# Altium PCB Bhishma_SlaveLayout.PcbDoc (part 2 of 2)
Units mil, origin at the board's own origin, x right, y up, seen from the top; angles counter-clockwise.
Board outline 3750 x 3500 mil, 3 copper layers (Top Layer, Internal Plane 13, Bottom Layer); 96 components, 63 nets, 347 pads, 425 vias.
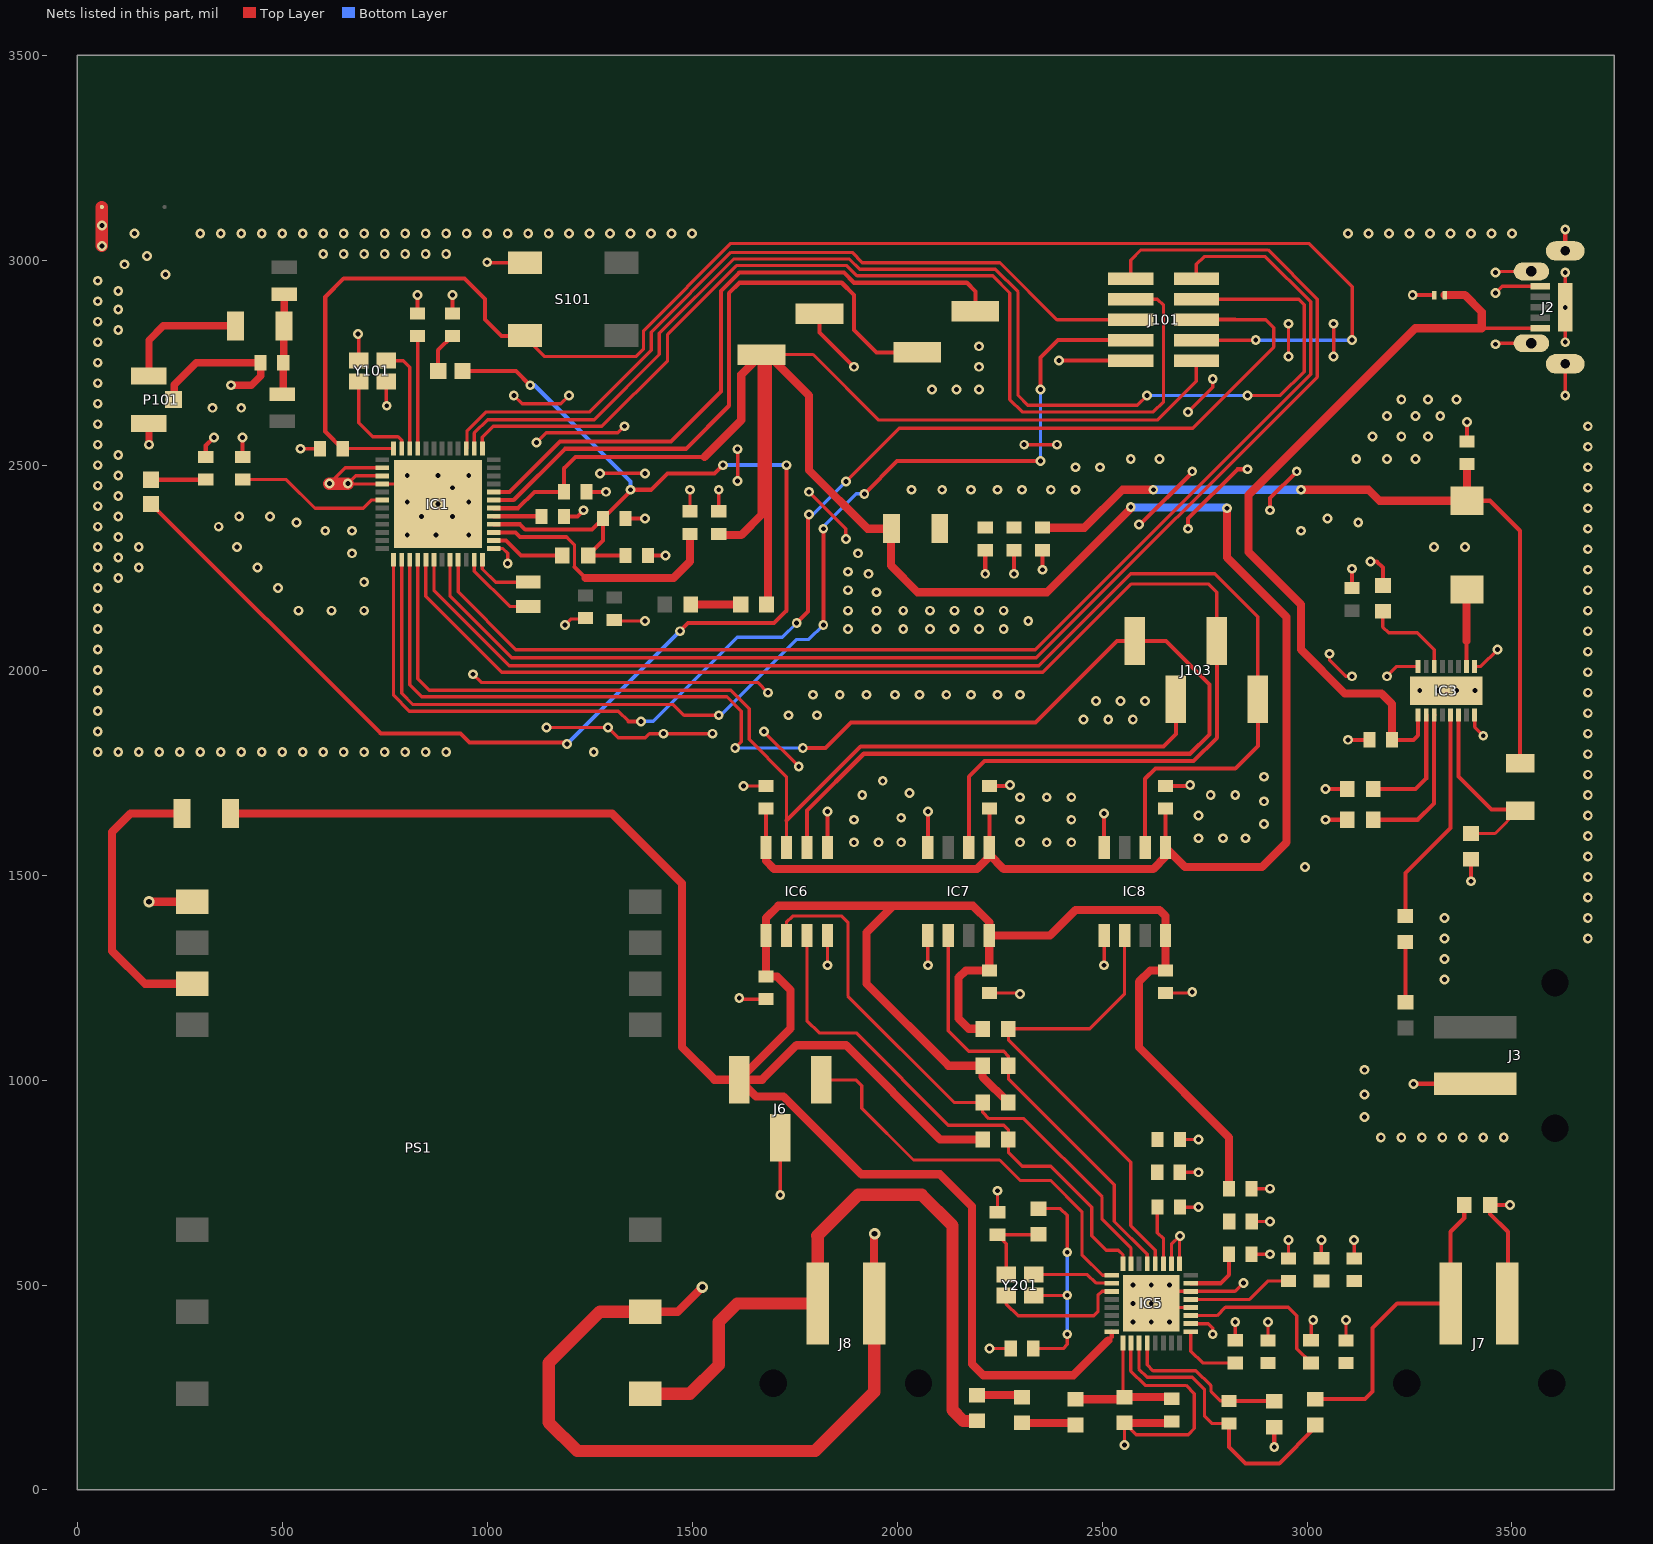
[diagram p3: the nets of this part, all layers, seen from the top]

## Via types
v1: diameter 24, hole 12, Top Layer to Bottom Layer, tented both sides, 422 vias
v2: diameter 28, hole 14, Top Layer to Bottom Layer, tented both sides, 3 vias

## Nets (pads, with @x,y where several pads share a name; then routed paths per layer and width w, separated by ;. In a path a pad name is that pad's centre, name@x,y a point inside that pad or via, vN(x,y) a via of type N, cw(c..) or ccw(c..) an arc to the next point about the centre after c; other vN are vias at no path point) (continued)
BGND: AT1.2 C31.1 C32.2 C33.1 C101.1 C102.2 C103.2 C106.2 C107.1 C108.2 C110.1 C111.1 C113.1 C115.2 C116.2 C118.2 C119.2 C123.1 C147.1 C148.1 C149.1 C217.2 C218.2 C220.2 D31.1 IC1.14 IC1.15 IC1.16 IC1.37 IC1.49 IC3.8 IC3.9 IC3.16 IC3.17 IC6.5 IC7.4 IC8.4 J2.5 J2.SH1 J2.SH2 J2.SH3 J2.SH4 J2.SH5 J3.1 J101.2 J105.2 P101.2 P101.3 R31.1 R32.1 R34.2 R36.1 S101.1 Y101.2 Y101.4 | length 7294.2
  Top Layer w8: v1(545,2540) C107.1@592.44,2540 ; v1(615,2455) 653.58,2493.58 IC1.14@744.17,2493.58 ; v1(685,2820) 686.54,2818.46 Y101.4@686.54,2755.59 ; IC1.15@744.17,2473.9 678.9,2473.9 v1(660,2455) 660.79,2454.21 IC1.16@744.17,2454.21 830.79,2454.21 v1(880,2405) ; Y101.2@753.46,2704.41 753.46,2646.54 v1(755,2645) ; v1(965,1990) 985,1970 1660,1970 v1(1685,1945) ; v1(1000,2995) 1001.42,2993.58 S101.1@1091.89,2993.58 ; IC1.37@1015.83,2296.73 1038.27,2296.73 1050,2285 v1(1050,2260) ; v1(1065,2670) 1085,2650 1180,2650 v1(1200,2670) ; v1(1120,2555) 1144,2579 1319,2579 v1(1335,2595) ; v1(1145,1860) v1(1295,1860) 1320,1835 1385.91,1835 1395.91,1845 v1(1430,1845) v1(1550,1845) ; v1(1190,2110) 1205,2125 1237.56,2125 C123.1@1240,2127.44 ; v1(1275,2480) v1(1385,2480) ; C113.1@1310,2122.44 1312.44,2120 v1(1385,2120) ; C111.1@1495,2387.56 v1(1495,2440) ; C110.1@1565,2387.56 v1(1565,2440) ; v1(1611,2461) v1(1611,2539) ; v1(1625,1717.56) C217.2@1680,1717.56 ; v1(1675,1850) v1(1760,1765) ; v1(1785,2435) 1875,2345 v1(1875,2320) ; v1(2310,2550) v1(2390,2550) ; v1(2710,2630) 2770,2690 v1(2770,2710) ; v1(2955,2765) v1(2955,2845) ; v1(3055,2040) 3055,2024.09 3094.09,1985 v1(3110,1985) ; v1(3065,2765) v1(3065,2845) ; v1(3195,1985) 3219.06,2009.06 IC3.16@3271.1,2009.06 ; IC3.8@3408.9,1890.94 3408.9,1861.1 v1(3430,1840) ; IC3.9@3408.9,2009.06 3424.06,2009.06 v1(3465,2050) ; v1(3460,2795) 3462.4,2797.4 J2.SH2@3547.32,2797.4 ; v1(3460,2920) 3476.18,2936.18 J2.5@3568.98,2936.18 ; v1(3460,2970) 3462.6,2972.6 J2.SH3@3547.32,2972.6 ; v1(3630,2670) J2.SH1@3630,2747.2 ; v1(3630,2800) v1(3630,2885) v1(3630,2970)
  Top Layer w10: C108.2@313.5,2520.12 313.5,2547.56 v1(333.5,2567.56) ; C106.2@403.5,2520.12 v1(403.5,2567.56) ; C102.2@830,2870.12 v1(830,2915) ; C103.2@915,2870.12 v1(915,2915) ; C118.2@1187.56,2375 1220,2375 v1(1235,2390) ; C115.2@1242.56,2435 v1(1290,2435) ; C119.2@1337.56,2370 v1(1385,2370) ; C116.2@1392.56,2280 v1(1435,2280) ; J105.2@1810.87,2870 1810.87,2824.13 v1(1895,2740) ; IC6.5@1830,1567.28 v1(1830,1655) ; IC7.4@2075,1567.28 v1(2075,1655) ; v1(2215,2235) C147.1@2215,2292.44 ; C218.2@2225,1717.56 2272.56,1717.56 v1(2275,1720) ; v1(2285,2235) C148.1@2285,2292.44 ; v1(2355,2245) C149.1@2355,2292.44 ; v1(2395,2755) J101.2@2570,2755 ; IC8.4@2505,1567.28 v1(2505,1650) ; v1(2590,2355) 2592.33,2355 2720,2482.67 v1(2720,2485) ; C220.2@2655,1717.56 2712.56,1717.56 v1(2715,1720) ; v1(2710,2345) 2710,2370 2830,2490 v1(2855,2490) ; v1(2910,2390) 2910,2420 v1(2975,2485) ; v1(3045,1635) R32.1@3098.5,1635 ; v1(3045,1710) R31.1@3098.5,1710 ; v1(3100,1830) C31.1@3152.44,1830 ; C32.2@3110,2200 v1(3110,2247.44) ; v1(3155,2265) 3170,2265 3185,2250 R34.2@3185,2206.5 ; v1(3257.8,2915) D31.1@3310,2915 ; v1(3260,990) 3261.1,991.1 J3.1@3410.12,991.1 ; C33.1@3390,2557.56 v1(3390,2605) ; v1(3400,1485) R36.1@3400,1538.5 ; J2.SH4@3630,3022.8 v1(3630,3075)
  Top Layer w18: v1(175,2550) P101.2@174.96,2601.93 ; P101.3@236.27,2661.27 236.27,2696.27 290,2750 C101.1@447.44,2750 447.44,2717.44 425,2695 v1(375,2695)
  Top Layer w20: v1(175,2550) v1(175,2550) ; P101.3@235,2660 P101.3@236.27,2661.27
  Top Layer w30: v1(60,3035) v1(60,3085) AT1.2@60,3130 ; v1(615,2455) v1(660,2455)
  other v1: 3180,860 3230,860 3280,860 3330,860 3380,860 3430,860 3480,860 3140,910 3140,965 3140,1025 3335,1245 3335,1295 3335,1345 3685,1345 3335,1395 3685,1395 3685,1445 3685,1495 2995,1520 3685,1545 1895,1580 1955,1580 2010,1580 2300,1580 2365,1580 2425,1580 2735,1590 2795,1590 2850,1590 3685,1595 2895,1625 1895,1635 2300,1635 2425,1635 2010,1640 2735,1645 3685,1645 2895,1680 2300,1690 2365,1690 2425,1690 1915,1695 2765,1695 2825,1695 3685,1695 2030,1700 1965,1730 2895,1740 3685,1745 3685,1795 50,1800 100,1800 150,1800 200,1800 250,1800 300,1800 350,1800 400,1800 450,1800 500,1800 550,1800 600,1800 650,1800 700,1800 750,1800 800,1800 850,1800 900,1800 1260,1800 3685,1845 50,1850 2455,1880 2515,1880 2575,1880 1735,1890 1805,1890 3685,1895 50,1900 2485,1925 2545,1925 2605,1925 1795,1940 1860,1940 1925,1940 1995,1940 2055,1940 2120,1940 2180,1940 2245,1940 2300,1940 3685,1945 50,1950 3275,1950 3320,1950 3365,1950 3410,1950 3685,1995 50,2000 3685,2045 50,2050 3685,2095 50,2100 1880,2100 1950,2100 2015,2100 2080,2100 2140,2100 2200,2100 2260,2100 2320,2120 540,2145 620,2145 700,2145 1880,2145 1950,2145 2015,2145 2080,2145 2140,2145 2200,2145 2260,2145 3685,2145 50,2150 1950,2190 1880,2195 3685,2195 50,2200 490,2200 700,2215 100,2225 1930,2235 1880,2240 3685,2245 50,2250 150,2250 440,2250 100,2275 670,2285 1905,2285 3685,2295 50,2300 150,2300 390,2300 3310,2300 3385,2300 100,2325 805,2330 875,2330 955,2330 605,2340 670,2340 2985,2340 3685,2345 50,2350 345,2350 535,2360 3125,2360 3050,2370 100,2375 395,2375 470,2375 840,2375 915,2375 3685,2395 50,2400 805,2410 955,2410 100,2425 2035,2440 2110,2440 2180,2440 2245,2440 2305,2440 2375,2440 2435,2440 915,2445 3685,2445 50,2450 100,2475 805,2475 880,2475 955,2475 2435,2495 2495,2495 3685,2495 50,2500 2570,2515 2640,2515 3120,2515 3195,2515 3265,2515 100,2525 3685,2545 50,2550 3160,2570 3230,2570 3295,2570 3685,2595 50,2600 3195,2620 3265,2620 3325,2620 330,2640 400,2640 50,2650 3230,2660 3295,2660 3365,2660 2085,2685 2145,2685 2200,2685 50,2700 2200,2740 50,2750 2200,2790 50,2800 100,2830 50,2850 100,2880 50,2900 100,2925 50,2950 215,2965 115,2990 170,3010 600,3015 650,3015 700,3015 750,3015 800,3015 850,3015 900,3015 140,3065 300,3065 350,3065 400,3065 450,3065 500,3065 550,3065 600,3065 650,3065 700,3065 750,3065 800,3065 850,3065 900,3065 950,3065 1000,3065 1050,3065 1100,3065 1150,3065 1200,3065 1250,3065 1300,3065 1350,3065 1400,3065 1450,3065 1500,3065 3100,3065 3150,3065 3200,3065 3250,3065 3300,3065 3350,3065 3400,3065 3450,3065 3500,3065
CLK_OUT: IC5.1 J6.3 | length 999.8
  Top Layer w8: J6.3@1815,1000.87 1815.87,1000 1900,1000 1914,986 1914,931 2040,805 2250,805 2300,755 2375,755 2451,679 2451,574 2501.1,523.9 IC5.1@2523.54,523.9
CMU_CLK0: IC1.43 J104.1 | length 1533.9
  Top Layer w10: IC1.43@1015.83,2414.84 1064.84,2414.84 1190,2540 1485,2540 1590,2645 1590,2919.54 1615.46,2945 1865,2945 1895,2915 1895,2830 1950,2775 J104.1@2049.13,2775
CMU_CLK1: IC1.44 J104.2 | length 1608.5
  Top Layer w10: IC1.44@1015.83,2434.53 1054.53,2434.53 1178,2558 1448,2558 1570,2680 1570,2925 1615,2970 1870,2970 1895,2945 2170,2945 2190.87,2924.13 J104.2@2190.87,2875
CT: J7.1 R207.2 R209.2 | length 773.1
  Top Layer w10: R207.2@3020,221.5 3141.5,221.5 3160,240 3160,395 3220,455 3279.76,455 3279.88,454.88 J7.1@3351.1,454.88 3350,455.98 3350,630 3383.5,663.5 R209.2@3383.5,695
DEBUG.RESET: C107.2 IC1.12 J101.3 S101.3 | length 3838.1
  Top Layer w8: C107.2@647.56,2540 648.39,2540.83 IC1.12@771.73,2540.83 ; S101.3@1090.47,2815 1140.47,2765 1362.56,2765 1381.45,2783.89 1381.45,2828.37 1594.08,3041 3004,3041 3110,2935 v1(3110,2805) ; J101.3@2730,2805 v1(2875,2805)
  Top Layer w10: C107.2@647.56,2540 605,2582.56 605,2910 650,2955 945,2955 995,2905 995,2855 1035,2815 S101.3@1090.47,2815
  Bottom Layer w8: v1(2875,2805) v1(3110,2805)
DEBUG.TCK_SWCLK: IC1.1 J101.8 | length 2531.9
  Top Layer w8: IC1.1@988.27,2540.83 988.27,2568.27 1015,2595 1280,2595 1440,2755 1440,2819.04 1607.96,2987 1877.04,2987 1902.04,2962 2233,2962 2275,2920 2275,2660 2305,2630 2625,2630 2650,2655 2650,2890 2635,2905 J101.8@2570,2905
DEBUG.TDO_SWO: IC1.3 J101.6 | length 1938
  Top Layer w8: IC1.3@948.9,2540.83 950.68,2540.83 950.68,2583.3 997.37,2630 1250.19,2630 1400,2779.81 1400,2824.3 1594.7,3019 1890.3,3019 1915.3,2994 2251,2994 2390,2855 J101.6@2570,2855
DEBUG.TMS_SWDIO: IC1.2 J101.7 | length 3030.2
  Top Layer w8: IC1.2@968.58,2540.83 968.58,2578.58 1001,2611 1261,2611 1420,2770 1420,2821.67 1601.33,3003 1883.67,3003 1908.67,2978 2239.63,2978 2295,2922.63 2295,2670 2319,2646 2586,2646 v1(2610,2670) ; J101.7@2730,2905 2979.75,2905 2993,2891.75 2993,2728.25 2934.87,2670.13 2855.13,2670.13 v1(2855,2670)
  Bottom Layer w8: v1(2610,2670) v1(2855,2670)
DECOUPLE: C118.1 IC1.41 | length 116.6
  Top Layer w10: IC1.41@1015.83,2375.47 C118.1@1132.44,2375.47
DVDD: C116.1 C119.1 IC1.40 L103.2 L104.1 L105.1 | length 3806.2
  Top Layer w10: L105.1@180,2405.47 740.47,1845 935,1845 957,1823 1192,1823 v1(1195,1820) ; L104.1@939.53,2730 1070,2730 v1(1105,2695) ; IC1.40@1015.83,2355.79 1080,2355.79 1092.79,2343 1255.44,2343 C119.1@1282.44,2370 ; C116.1@1337.44,2280 L103.2@1246.5,2280 1282.44,2315.94 C119.1@1282.44,2370 ; v1(1470,2095) 1490,2115 1700,2115 1730,2145 v1(1730,2500) ; v1(1575,2500) 1555,2480 1440,2480 1400,2440 v1(1350,2440) 1350,2437.56 C119.1@1282.44,2370
  Bottom Layer w10: v1(1105,2695) 1115,2695 1350,2460 v1(1350,2440) ; v1(1195,1820) v1(1470,2095) ; v1(1575,2500) v1(1730,2500)
FRC_DFRAME: IC1.33 J101.9 | length 3039.1
  Top Layer w8: IC1.33@929.21,2269.17 929.21,2190.79 1070,2050 2337.37,2050 3009,2721.63 3009,2898.37 2898.37,3009 2749,3009 2730,2990 J101.9@2730,2955
FRC_DOUT: IC1.32 J101.10 | length 3300.3
  Top Layer w8: IC1.32@909.53,2269.17 909.53,2180.47 1060,2030 2340,2030 3025,2715 3025,2905 2905,3025 2595,3025 2570,3000 J101.10@2570,2955
HFXTAL_N: IC1.10 Y101.3 | length 262.6
  Top Layer w8: Y101.3@753.46,2755.59 754.06,2755 795,2755 811.1,2738.9 IC1.10@811.1,2540.83
HFXTAL_P: IC1.11 Y101.1 | length 243.4
  Top Layer w8: Y101.1@686.54,2704.41 686.54,2603.46 720.44,2569.56 782.61,2569.56 791.42,2560.75 IC1.11@791.42,2540.83
IOVDD: C110.2 C111.2 C115.1 C217.1 C218.1 C220.1 IC1.39 IC1.42 IC6.8 IC7.1 IC8.1 J101.1 J105.1 L106.2 R104.2 | length 8102.5
  Top Layer w8: IC1.42@1015.83,2395.16 IC1.42@1015.98,2395 ; 1192.88,2325 1213.22,2304.66 1213.22,2251.78 ; C111.2@1490,2327.44 C111.2@1495,2332.44 ; J105.1@1685,2770 1795,2770 1955,2610 2635,2610 2730,2705 J101.1@2730,2755 ; IC7.1@2225,1545 IC7.1@2225,1550
  Top Layer w10: IC1.39@1015.83,2336.1 1068.9,2336.1 1080,2325 1192.88,2325 ; IC1.42@1015.98,2395 1075,2395 1115,2435 C115.1@1187.44,2435 1187.44,2492.44 1215,2520 1530,2520 ; 1213.22,2251.78 1240,2225 ; C110.2@1565,2332.44 C110.2@1567.44,2330 ; J105.1@1669.13,2770 J105.1@1685,2754.13 ; IC6.8@1680,1567.28 C217.1@1680,1662.44 ; R104.2@1985,2344.06 R104.2@1985.94,2345 ; IC7.1@2225,1567.28 C218.1@2225,1662.44 ; IC8.1@2655,1567.28 C220.1@2655,1662.44
  Top Layer w20: 1240,2225 1455,2225 1495,2265 C111.2@1495,2332.44 ; 1530,2520 1620,2610 1620,2720.87 J105.1@1669.13,2770 1669.13,2379.13 1620,2330 C110.2@1567.44,2330 ; IC6.8@1680,1567.28 1680,1535 1700,1515 2195,1515 IC7.1@2225,1545 ; L106.2@1681.5,2160 1685,2163.5 J105.1@1685,2754.13 ; J105.1@1685,2770 1785,2670 1785,2487.67 1927.67,2345 R104.2@1985.94,2345 ; R104.2@1985,2344.06 1985,2255 2050,2190 2365.6,2190 2570,2394.4 v1(2570,2397.67) ; IC7.1@2225,1567.28 2225,1550 2260,1515 2625,1515 2655,1545 IC8.1@2655,1567.28 2702.28,1520 2890,1520 2950,1580 2950,2130 2805,2275 v1(2805,2395)
  Bottom Layer w10: v1(2570,2397.67) 2570,2400 v1@2573,2397 ; v1@2803,2397 v1(2805,2395)
  Bottom Layer w20: v1@2573,2397 v1@2803,2397
IP_1: C222.2 IC5.11 R207.1 | length 702.9
  Top Layer w8: IC5.11@2590.47,358.54 2590,358.07 2590,295 2610,275 2720,275 2750,245 2750,180 2767.56,162.44 C222.2@2810,162.44
  Top Layer w10: C222.2@2810,162.44 2810,105 2850,65 2932.33,65 3020,152.67 R207.1@3020,158.5
IP_2: C222.1 IC5.12 R208.1 | length 408.5
  Top Layer w8: IC5.12@2610.16,358.54 2610,358.39 2610,305 2624,291 2729,291 2765,255 2765,253.63 2766,252.63 2766,240 2788.44,217.56 C222.1@2810,217.56
  Top Layer w10: C222.1@2810,217.56 2918.94,217.56 R208.1@2920,216.5
L: J8.1 PS1.1 R210.1 | length 1662.2
  Top Layer w20: 1805,620 1806.1,618.9 ; J8.1@1805.98,455 J8.1@1806.1,454.88
  Top Layer w30: PS1.1@1385.67,235 1495,235 1565,305 1565,410 1610,455 J8.1@1805.98,455 ; 1805,620 1905,720 2060,720 2135,645 2135,195 2161.5,168.5 R210.1@2195,168.5 ; J8.1@1806.1,454.88 1806.1,618.9
N: C201.1 C202.1 C203.1 C204.1 C205.1 C206.1 C207.1 C208.1 C209.1 C210.1 C211.1 C212.1 C213.1 C214.1 C215.1 C216.2 C219.2 C221.2 C223.1 IC5.10 IC5.18 IC5.20 IC5.22 IC5.25 IC5.26 IC5.33 IC6.4 IC7.5 IC8.5 J6.2 J7.2 J8.2 PS1.3 PS1.14 R208.2 R209.1 R213.1 | length 4845.9
  Top Layer w8: v1(1615,1200) 1617.56,1197.44 C216.2@1680,1197.44 ; v1(1715,720) J6.2@1715,859.13 ; v1(1830,1280) IC6.4@1830,1352.72 ; v1(2075,1280) IC7.5@2075,1352.72 ; v1(2225,345) C201.1@2277.44,345 ; C219.2@2225,1212.44 2297.56,1212.44 v1(2300,1210) ; C202.1@2245,677.56 v1(2245,730) ; v1(2505,1280) IC8.5@2505,1352.72 ; v1(2555,110) R213.1@2555,163.5 2583.5,135 2710,135 2725,150 2725,235 2705,255 2605,255 2570,290 2570,357.76 IC5.10@2570.79,358.54 ; C221.2@2655,1212.44 2717.44,1212.44 v1(2720,1215) ; IC5.26@2669.21,551.46 2669.21,599.21 2688.9,618.9 IC5.25@2688.9,551.46 ; C210.1@2690,690 v1(2735,690) ; C211.1@2690,775 v1(2735,775) ; C212.1@2690,855 v1(2735,855) ; IC5.18@2716.46,405.79 2759.21,405.79 2770,395 v1(2770,380) ; IC5.20@2716.46,445.16 2629.84,445.16 v1(2620,455) 2649.53,484.53 IC5.22@2716.46,484.53 2824.53,484.53 v1(2845,505) ; C204.1@2825,365 v1(2825,410) ; C213.1@2865,575 v1(2909.88,575) ; C214.1@2865,655 v1(2909.88,655) ; C215.1@2865,735 v1(2909.88,735) ; C203.1@2905,365 v1(2905,410) ; C209.1@2955,565 v1(2955,610) ; C206.1@3010,365 3010,410 v1(3015,415) ; C208.1@3035,565 v1(3035,610) ; C205.1@3095,365 v1(3095,415) ; C207.1@3115,565 v1(3115,610)
  Top Layer w10: v1(2920,105) R208.2@2920,153.5 ; J7.2@3488.9,454.88 3490,455.98 3490,630 3446.5,673.5 R209.1@3446.5,695 v1(3495,695)
  Top Layer w20: v2(175,1435) PS1.14@280.55,1435 ; PS1.3@1385.67,435 1465,435 v2(1525,495) ; J8.2@1943.9,454.88 1943.9,623.9 v2(1945,625) ; R213.1@2555,163.5 2666.06,163.5 C223.1@2670,167.44
  Top Layer w30: PS1.3@1385.67,435 1275,435 1150,310 1150,165 1220,95 1800,95 1943.9,238.9 J8.2@1943.9,454.88
  other v1: 2575,410 2620,410 2665,410 2575,455 2575,500 2620,500 2665,500 2690,620
NetC31_2: C31.2 D31.2 IC3.1 J2.1 | length 1941.4
  Top Layer w8: 3426.18,2833.82 J2.1@3568.98,2833.82
  Top Layer w10: C31.2@3207.56,1830 3260,1830 3271.1,1841.1 IC3.1@3271.1,1890.94 ; D31.2@3335.35,2914.76 D31.2@3335.59,2915
  Top Layer w20: C31.2@3207.56,1830 3207.56,1917.44 3182,1943 3092,1943 2985,2050 2985,2160 2857,2288 2857,2427 3263.82,2833.82 3426.18,2833.82 3426.18,2873.82 3385,2915 D31.2@3335.59,2915
NetC33_2: C33.2 C147.2 C148.2 C149.2 L2.2 R35.2 R104.1 | length 1967.6
  Top Layer w8: C147.2@2212.44,2345 C147.2@2215,2347.56
  Top Layer w10: L2.2@3390,2413.27 3446.73,2413.27 3520,2340 R35.2@3520,1772.87
  Top Layer w20: C149.2@2355,2347.56 2457.44,2347.56 2549.88,2440 v1(2625,2440) ; v1(2985,2440) 3150,2440 3176.73,2413.27 L2.2@3390,2413.27 C33.2@3390,2502.44
  Bottom Layer w8: v1(2985,2440) 3048,2440
  Bottom Layer w20: v1(2625,2440) v1(2985,2440)
NetC101_2: C101.2 L101.1 L102.2 R102.1 | length 246.5
  Top Layer w10: L102.2@500,2672.8 L102.2@502.56,2675.35
  Top Layer w18: L102.2@502.56,2675.35 C101.2@502.56,2750 ; C101.2@504.06,2751.5 R102.1@504.06,2840 ; R102.1@505,2840.94 L101.1@505,2917.2
  Top Layer w20: C101.2@502.56,2750 C101.2@504.06,2751.5 ; R102.1@504.06,2840 R102.1@505,2840.94
NetC201_2: C201.2 R201.2 Y201.2 | length 560.2
  Top Layer w8: C201.2@2332.56,345 2405,345 2415,355 v1(2415,380) ; Y201.2@2333.46,474.41 2414.41,474.41 v1(2415,475) ; R201.2@2345,686.5 2398.5,686.5 2415,670 v1(2415,580)
  Bottom Layer w8: v1(2415,380) v1(2415,475) v1(2415,580)
NetC202_2: C202.2 R201.1 Y201.4 | length 207.5
  Top Layer w8: Y201.4@2267.44,526.5 Y201.4@2266.54,525.59 2266.54,600.91 C202.2@2245,622.44 2343.94,622.44 R201.1@2345,623.5
NetIC3_2: IC3.2 R31.2 | length 295.1
  Top Layer w10: R31.2@3161.5,1710 3265,1710 3290.79,1735.79 IC3.2@3290.79,1890.94
NetIC3_3: IC3.3 R32.2 | length 381.2
  Top Layer w10: R32.2@3161.5,1635 3270,1635 3310,1675 3310,1890.47 IC3.3@3310.47,1890.94
NetIC3_5: IC3.5 LED2.1 | length 536.4
  Top Layer w10: LED2.1@3240,1400 3240,1505 3349.84,1614.84 IC3.5@3349.84,1890.94
NetIC3_14: IC3.14 R34.1 | length 227.4
  Top Layer w8: R34.1@3185,2143.5 3185,2105 3199,2091 3269,2091 3310.47,2049.53 IC3.14@3310.47,2009.06
NetL106_1: L106.1 R101.2 | length 122
  Top Layer w20: R101.2@1496.5,2160 L106.1@1618.5,2160
NetLED2_2: LED2.2 R33.2 | length 147
  Top Layer w10: R33.2@3240,1190 LED2.2@3240,1337.01
NetP101_1: P101.1 R102.2 | length 312.4
  Top Layer w18: P101.1@174.96,2718.07 174.96,2804.96 210,2840 R102.2@385.94,2840
  Top Layer w20: P101.1@174.96,2718.07 P101.1@174.96,2718.07
NetPS1_16: PS1.16 R202.1 | length 708.3
  Top Layer w20: R202.1@255.94,1650 130,1650 85,1605 85,1315 165,1235 PS1.16@280.55,1235
NetR210_2: R210.2 R211.1 | length 112.1
  Top Layer w20: R210.2@2195,231.5 2300,231.5 R211.1@2305,226.5
NetR211_2: R211.2 R212.1 | length 132.1
  Top Layer w20: R211.2@2305,163.5 2430,163.5 R212.1@2435,158.5
PA2: IC1.27 IC6.6 J103.1 | length 3817
  Top Layer w8: IC1.27@811.1,2269.17 811.1,1963.9 840,1935 1585,1935 1620,1900 1620,1825 v1(1605,1810)
  Top Layer w10: v1(1770,1810) 1825,1810 1887.71,1872.71 2337.71,1872.71 2536.26,2071.26 J103.1@2580,2071.26 2655.74,2071.26 2762,1965 2762,1843 2715,1796 1918.67,1796 1780,1657.33 IC6.6@1780,1567.28
  Bottom Layer w8: v1(1605,1810) v1(1770,1810)
PA3: IC1.28 IC6.7 J103.2 | length 2627.1
  Top Layer w8: IC1.28@830.79,2269.17 830.79,1979.21 859,1951 1594,1951 1639,1906 1639,1831 1730,1740 1730,1632.78 IC6.7@1730,1567.28
  Top Layer w10: 1730,1632.78 1911.22,1814 2650,1814 2680,1844 J103.2@2680,1928.74
PA4: IC1.29 IC7.2 J103.3 | length 3365.3
  Top Layer w8: IC1.29@850.47,2269.17 850.13,2268.83 850.13,2179.87 1035,1995 2355.46,1995 2570.46,2210 2760,2210 2780,2190 J103.3@2780,2071.26
  Top Layer w10: IC7.2@2175,1567.28 2175,1740 2213,1778 2723,1778 2780,1835 J103.3@2780,2071.26
PA5: IC1.30 IC8.2 J103.4 | length 3087.6
  Top Layer w8: IC1.30@870.16,2269.17 870,2269.02 870,2195 1054,2011 2346,2011 2570,2235 2775,2235 2880,2130 J103.4@2880,1928.74
  Top Layer w10: IC8.2@2605,1567.28 2605,1735 2630,1760 2825,1760 2880,1815 J103.4@2880,1928.74
PAVDD_MCU: C106.1 C108.1 IC1.18 L105.2 | length 511.6
  Top Layer w8: C108.1@313.03,2464.53 C108.1@313.5,2465 ; C106.1@403.5,2465 510,2465 580,2395 697.38,2395 717.22,2414.84 IC1.18@744.17,2414.84
  Top Layer w10: L105.2@180,2464.53 C108.1@313.03,2464.53
PB14: IC1.35 Y102.2 | length 194.8
  Top Layer w8: IC1.35@968.58,2269.17 968.58,2241.42 1054.53,2155.47 Y102.2@1100,2155.47
PB15: IC1.36 Y102.1 | length 147.5
  Top Layer w8: IC1.36@988.27,2269.17 988.27,2246.73 1020.47,2214.53 Y102.1@1100,2214.53
RFVDD_MCU: C102.1 C103.1 IC1.9 L104.2 | length 373.8
  Top Layer w8: C102.1@830,2815 830.79,2814.21 IC1.9@830.79,2540.83
  Top Layer w10: L104.2@880.47,2730 880.47,2780.47 C103.1@915,2815
RX_IC: IC5.31 IC6.2 R204.1 | length 1404.3
  Top Layer w8: IC6.2@1730,1352.72 1730,1385 1745,1400 1865,1400 1880,1385 1880,1205 2140,945 R204.1@2208.5,945 2208.5,921.5 2224,906 2309,906 2500,715 2500,660 2570.79,589.21 IC5.31@2570.79,551.46
SCS_IC: IC5.29 IC7.6 R205.1 | length 1052
  Top Layer w8: IC7.6@2125,1352.72 2125,1120 2175,1070 2260,1070 2271.5,1058.5 R205.1@2271.5,1035 2271.5,1003.5 2530,745 2530,655 2610.16,574.84 IC5.29@2610.16,551.46
SW: IC3.10 L2.1 | length 186.4
  Top Layer w8: L2.1@3389.21,2195.94 L2.1@3390,2196.73
  Top Layer w10: IC3.10@3389.21,2009.06 3389.21,2069.21
  Top Layer w20: 3389.21,2070.79 L2.1@3389.21,2195.94
SYN_IC: IC5.28 IC8.6 R206.1 | length 1183.4
  Top Layer w8: IC8.6@2555,1352.72 2555,1210 2470,1125 R206.1@2271.5,1125 2271.5,1098.5 2570,800 2570,645 2629.84,585.16 IC5.28@2629.84,551.46
TX_IC: IC5.32 IC6.3 R203.1 | length 1311
  Top Layer w8: IC6.3@1780,1352.72 1780,1145 1810,1115 1900,1115 2125,890 2260,890 2271.5,878.5 R203.1@2271.5,855 2271.5,823.5 2305,790 2375,790 2475,690 2475,620 2510,585 2540,585 2551.1,573.9 IC5.32@2551.1,551.46
VCC: C213.2 C214.2 C215.2 C216.1 C219.1 C221.1 IC5.8 IC5.23 IC6.1 IC7.8 IC8.8 J6.1 R202.2 R203.2 R204.2 R205.2 R206.2 | length 7499.6
  Top Layer w10: 2515,365 2523.54,373.54 IC5.8@2523.54,386.1 ; IC5.23@2716.46,504.21 2789.21,504.21 2810,525 C213.2@2810,574.88
  Top Layer w20: R202.2@374.06,1650 1305,1650 1475,1480 1475,1080 1554.13,1000.87 J6.1@1615,1000.87 ; R203.2@2208.5,855 2105,855 1875,1085 1755,1085 1670.87,1000.87 J6.1@1615,1000.87 ; R206.2@2208.5,1125 2175,1125 2150,1150 2150,1250 2167.56,1267.56 C219.1@2225,1267.56 IC7.8@2225,1352.72 ; R204.2@2271.5,945 2208.5,1007.99 R205.2@2208.5,1035 2125,1035 1925,1235 1925,1360 1990,1425 ; 2515,365 2430,280 2210,280 2183,307 2183,692 2105,770 1912.86,770 1722.86,960 1655.87,960 J6.1@1615,1000.87 ; C213.2@2809.88,575 C213.2@2810,574.88 ; C215.2@2809.88,735 2809.88,860.12 2590,1080 2590,1240 2617.56,1267.56 C221.1@2655,1267.56 IC8.8@2655,1352.72 2655,1400 2640,1415 2435,1415 2372.72,1352.72 IC7.8@2225,1352.72 ; J6.1@1615,1000.87 1740,1125.87 1740,1220 1707.44,1252.56 C216.1@1680,1252.56 IC6.1@1680,1352.72 1680,1395 1710,1425 1990,1425 ; 1990,1425 2185,1425 2225,1385 IC7.8@2225,1352.72
VCOM.RX_MISO: IC1.26 J101.4 | length 2793.8
  Top Layer w8: IC1.26@791.42,2269.17 791.42,1943.58 819,1916 1454,1916 1480,1890 v1(1565,1890)
  Top Layer w10: v1(1820,2110) v1(1820,2345) ; v1(1920,2430) 2000,2510 v1(2350,2510) ; v1(2350,2685) 2350,2762.33 2392.67,2805 J101.4@2570,2805
  Bottom Layer w8: v1(1565,1890) 1570,1890 1755,2075 1785,2075 v1(1820,2110) ; v1(1820,2345) 1820,2350 1900,2430 v1(1920,2430) ; v1(2350,2510) v1(2350,2685)
VCOM.TX_MOSI: IC1.25 J101.5 | length 3269.4
  Top Layer w8: IC1.25@771.73,2269.17 771.73,1938.27 810,1900 1320,1900 1345,1875 ; v1(1755,2115) v1@1760,2115 ; v1(1875,2460) 2005,2590 2720.91,2590 2919,2788.09 2919,2835 2899,2855 2825,2855
  Top Layer w10: 1345,1875 v1(1375,1875) ; v1(1755,2115) 1783,2143 1783,2378 v1(1785,2380) ; J101.5@2730,2855 2825,2855
  Bottom Layer w8: v1(1375,1875) 1405,1875 1610,2080 1720,2080 v1(1755,2115) ; v1(1785,2380) 1795,2380 v1(1875,2460)
VDDA: C207.2 C208.2 C209.2 IC5.21 | length 257.2
  Top Layer w8: IC5.21@2716.46,464.84 2859.84,464.84 2904.88,509.88 C209.2@2955,509.88
VDDD: C210.2 C211.2 C212.2 IC5.27 | length 145
  Top Layer w8: C210.2@2634.88,690 2634.88,627.75 2650,612.63 2650,551.93 IC5.27@2649.53,551.46
VFB: IC3.6 R35.1 R36.2 | length 472.8
  Top Layer w8: R36.2@3400,1601.5 3458.62,1601.5 R35.1@3517.13,1660
  Top Layer w10: IC3.6@3369.53,1890.94 3369.53,1740.47 3450,1660 R35.1@3517.13,1660
VP_1: C223.2 IC5.9 R212.2 R213.2 | length 372.4
  Top Layer w8: IC5.9@2551.1,358.54 2551.1,230.39 R213.2@2555,226.5
  Top Layer w20: R212.2@2435,221.5 2550,221.5 R213.2@2555,226.5 2666.06,226.5 C223.2@2670,222.56
VREF1: C203.2 C204.2 IC5.17 | length 168
  Top Layer w8: IC5.17@2716.46,386.1 2716.46,338.54 2745.12,309.88 C204.2@2825,309.88
VREF2: C205.2 C206.2 IC5.19 | length 405.4
  Top Layer w8: IC5.19@2716.46,425.47 2780.47,425.47 2801,446 2954,446 2975,425 2975,344.88 C206.2@3010,309.88
VREGSW: IC1.38 L103.1 | length 182.8
  Top Layer w10: IC1.38@1015.83,2316.42 1045.91,2316.42 1082.33,2280 L103.1@1183.5,2280
XTAL1: IC5.3 Y201.1 | length 338.2
  Top Layer w8: Y201.1@2266.54,474.41 2266.54,453.46 2295,425 2480,425 2490,435 2490,475 2500,485 2523.07,485 IC5.3@2523.54,484.53
XTAL2: IC5.2 Y201.3 | length 199.8
  Top Layer w8: Y201.3@2333.46,525.59 2464.41,525.59 2485,505 2520.77,505 2521.76,505.99 IC5.2@2523.54,504.21
pads on no net: AT1.1 IC1.4 IC1.5 IC1.6 IC1.7 IC1.8 IC1.13 IC1.19 IC1.20 IC1.21 IC1.22 IC1.23 IC1.24 IC1.31 IC1.45 IC1.46 IC1.47 IC1.48 IC3.4 IC3.12 IC5.4 IC5.5 IC5.6 IC5.7 IC5.13 IC5.14 IC5.15 IC5.16 IC5.24 IC5.30 IC7.3 IC7.7 IC8.3 IC8.7 J2.2 J2.3 J2.4 J3.MH1 J3.MH2 J7.MH1 J7.MH2 J8.MH1 J8.MH2 L101.2 PS1.5 PS1.10 PS1.11 PS1.12 PS1.13 PS1.15 PS1.17 PS1.22 PS1.24 PS1.26 S101.2 S101.4
copper on no net: | length 395.6
  Top Layer w18: 213,3129.87 213,3097.15 213,3057 287.2,2982.8 505,2982.8

## Polygon pours and split planes (outlines as drawn)
BGND on Top Layer "BGND" (solid, remove dead copper, pour order 68): 15,3105 3735,3105 3735,820 3105,820 3105,1490 1585,1490 1585,1770 15,1770
VDDD on Top Layer "VDDD" (solid, pour order 12): 2602.44,655 2657.44,655 2657.44,890 2602.44,890
IOVDD on Top Layer "IOVDD" (solid, pour order 56): 1605,2295 1455,2295 1455,2360 1605,2360
AVDD on Top Layer "AVDD" (solid, pour order 54): 1200,2140 1350,2140 1350,2195 1200,2195
NetC33_2 on Top Layer "NETC33_2" (solid, pour order 58): 2075,2380 2390,2380 2390,2320 2075,2320
VCC on Top Layer "VCC" (solid, pour order 42): 2774.88,775 2774.88,540 2834.88,540 2834.88,775
VDDA on Top Layer "VDDA" (solid, pour order 8): 2920,460 3150,460 3150,540 2920,540
VREF2 on Top Layer "VREF2" (solid, pour order 6): 2975,277.44 3130,277.44 3130,332.44 2975,332.44
VREF1 on Top Layer "VREF1" (solid, pour order 2): 2790,272.44 2940,272.44 2940,332.44 2790,332.44
PAVDD_MCU on Top Layer "PAVDD_MCU" (solid, pour order 48): 273.5,2492.56 458.5,2492.56 458.5,2427.56 273.5,2427.56
RFVDD_MCU on Top Layer "RFVDD_MCU" (solid, pour order 50): 790,2842.56 955,2842.56 955,2777.56 790,2777.56
BGND on Bottom Layer "BGND" (solid, pour order 66): 15,3105 3735,3105 3735,820 3105,820 3105,1490 1585,1490 1585,1770 15,1770
N on Bottom Layer "N" (solid, pour order 64): 15,1700 1495,1700 1495,1450 2945,1450 2950,1455 2950,750 3735,750 3735,15 15,15
no net on Internal Plane 13 (split plane): 3729.9,2739.91 3555.78,2739.91 3555.78,3030.09 3729.9,3030.09
no net on Internal Plane 13 (split plane): 3729.9,3035.19 3553.23,3035.19 3552.25,3034.99 3551.43,3034.44 3550.87,3033.61 3550.68,3032.64 3550.68,2737.36 3550.87,2736.39 3551.43,2735.56 3552.25,2735.01 3553.23,2734.81 3729.9,2734.81 3729.9,20.1 20.1,20.1 20.1,3479.9 3729.9,3479.9

## Silkscreen, mask and mechanical layers (free items; w line width, h text height)
Top Overlay:
  drawing of 1136 lines, arcs and shapes, not listed
  text "AT1" at 825,3450 h20
  text "Hardik" at 3195,3272 h30
  text "Sarthak" at 3195,3222 h30
  text "Vatsal" at 3195,3172 h30
  text "Rev 0.1" at 3195,3122 h30
  text "Debug Connector" at 2685,2985 h20
  text "1" at 1035,2935 h20
  text "Supply" at 1635,2930 h20
  text "1" at 3267.8,2930 h20
  text "CLK" at 2000,2810 h20
  text "Push Button" at 1185,2745 h20
  text "1" at 650,2680 h20 r90
  text "+" at 1665,2675 h40 r90
  text "1" at 1035,2550 h20
  text "RX" at 2610,2090 h20
  text "1" at 2505,2080 h20
  text "SCS" at 2810,2065 h20
  text "1" at 3220,1865 h20
  text "SYN" at 2815,1845 h20
  text "TX" at 2700,1835 h20
  text "-" at 3225,1475 h40 r180
  text "1" at 3290,1428.5 h20 r270
  text "+" at 3230,1295 h40 r90
  text "+" at 3365,1190 h40 r90
  text "1" at 1585,1065 h20
  text "+" at 1590,1025 h40 r90
  text "CLK" at 1850,1015 h20
  text "-" at 3365,965 h40 r180
  text "-" at 1670,855 h40 r180
  text "-" at 3550,605 h40 r180
  text "-" at 2010,590 h40 r180
  text "+" at 3335,575 h40 r90
  text "+" at 1785,560 h40 r90
  text "1" at 2480,545 h20
  text "Current Sensing" at 3690,430 h20 r90
  text "AC Power measurement" at 110,295 h60 r90
  text "Voltage Sensing" at 2280,50 h20
Mechanical 13:
  the board outline again, w30
Mechanical 16:
  drawing of 1874 lines, arcs and shapes, not listed
  text "1" at -2373,5110 h20
  text "2" at 487,5110 h20
  text "3" at 3367,5110 h20
  text "4" at 6237,5110 h20
  text "A" at -3725,4204 h20
  text "A" at 7575,4204 h20
  text "B" at -3725,2312 h20
  text "B" at 7575,2312 h20
  text "C" at 7595,520 h20
  text "C" at -3725,402 h20
  text "ENGINEER:" at 3050,-1055 h20
  text "TITLE:" at 4550,-1055 h20
  text "PCB DESIGNER:" at 3050,-1350 h20
  text "D" at -3725,-1488 h20
  text "D" at 7575,-1488 h20
  text "DATE:" at 3050,-1655 h20
  text "PART NO.:" at 4550,-1655 h20
  text "REV:" at 6650,-1655 h20
  text "Altium Limited" at 1750,-1755 h20
  text ".PRINT_DATE" at 3100,-1775 h20
  text "12a Rodborough Rd" at 1750,-1855 h20
  text "Frenchs Forest" at 1750,-1955 h20
  text "FILE NAME:" at 3050,-1955 h20
  text "DWG NO:" at 4550,-1955 h20
  text "SCALE:" at 6650,-1955 h20
  text "NSW 2086" at 1750,-2055 h20
  text ".PCB_FILE_NAME_NO_PATH" at 3100,-2075 h20
  text "1" at -2373,-2290 h20
  text "2" at 487,-2290 h20
  text "3" at 3367,-2290 h20
  text "4" at 6237,-2290 h20